# Altium PCB iotv3.PcbDoc
Units mm, origin at the board's own origin, x right, y up, seen from the top; angles counter-clockwise.
Board outline 151 x 86.38 mm, 2 copper layers (Top Layer, Bottom Layer); 94 components, 91 nets, 294 pads, 1 vias.
Unrouted connection lines stored in the file: 1.
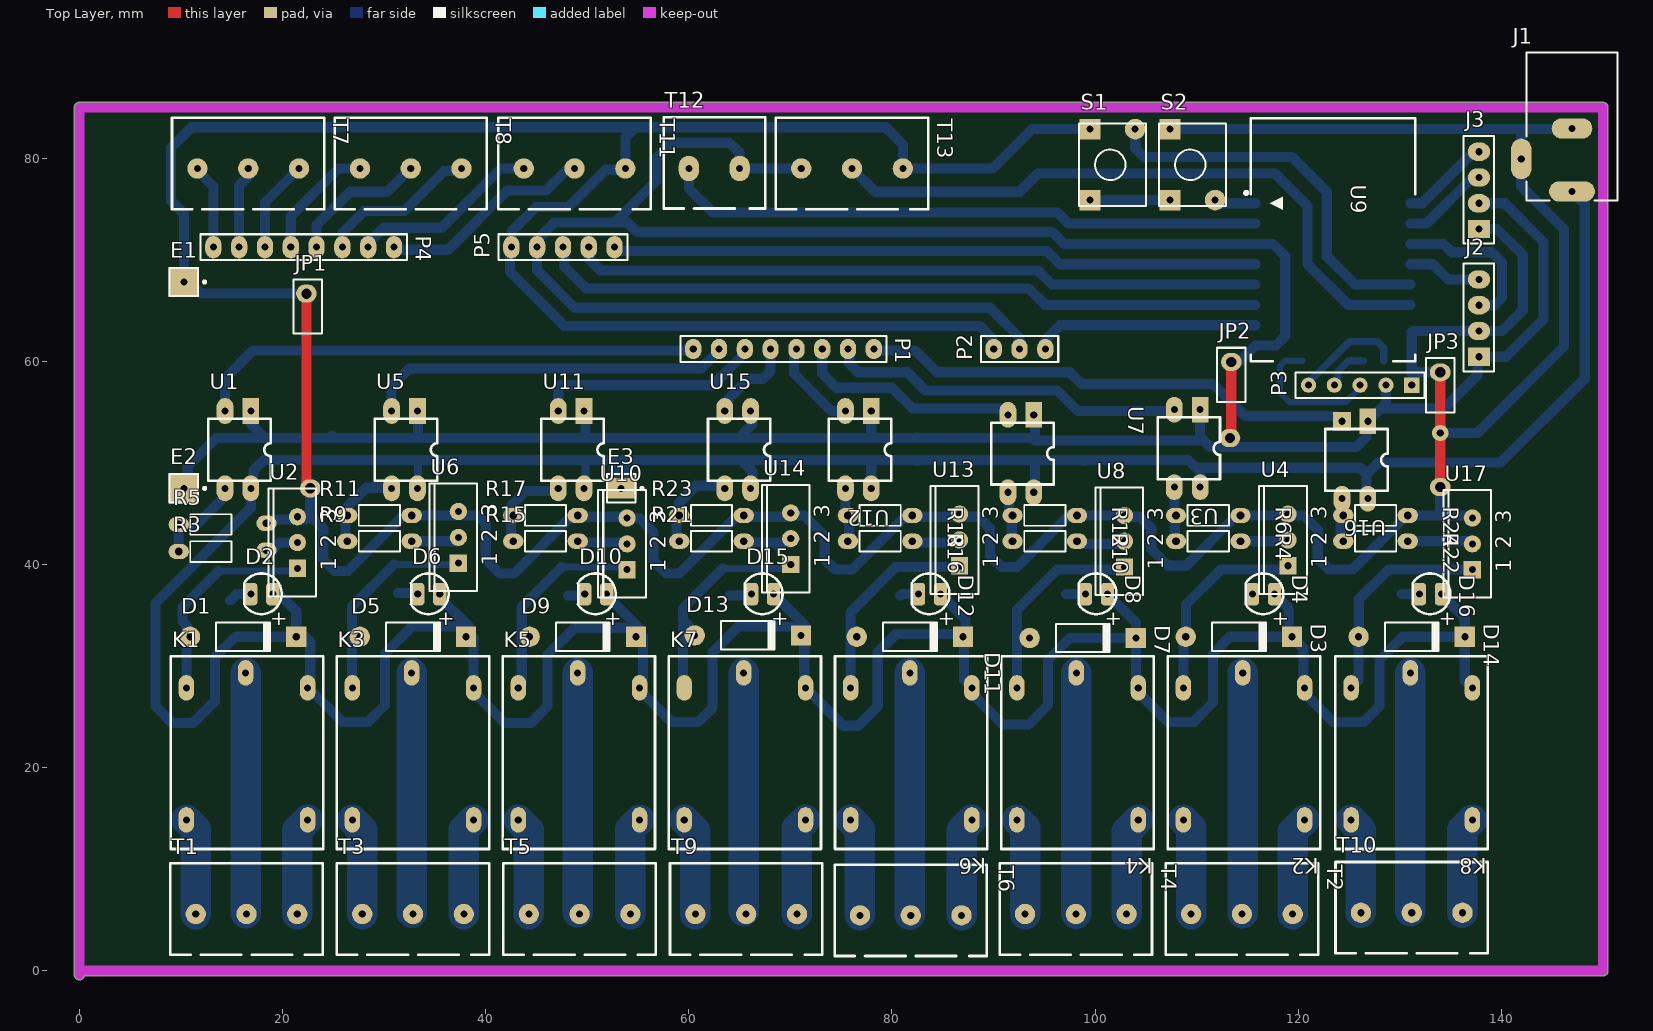
[diagram p0: Top Layer view]
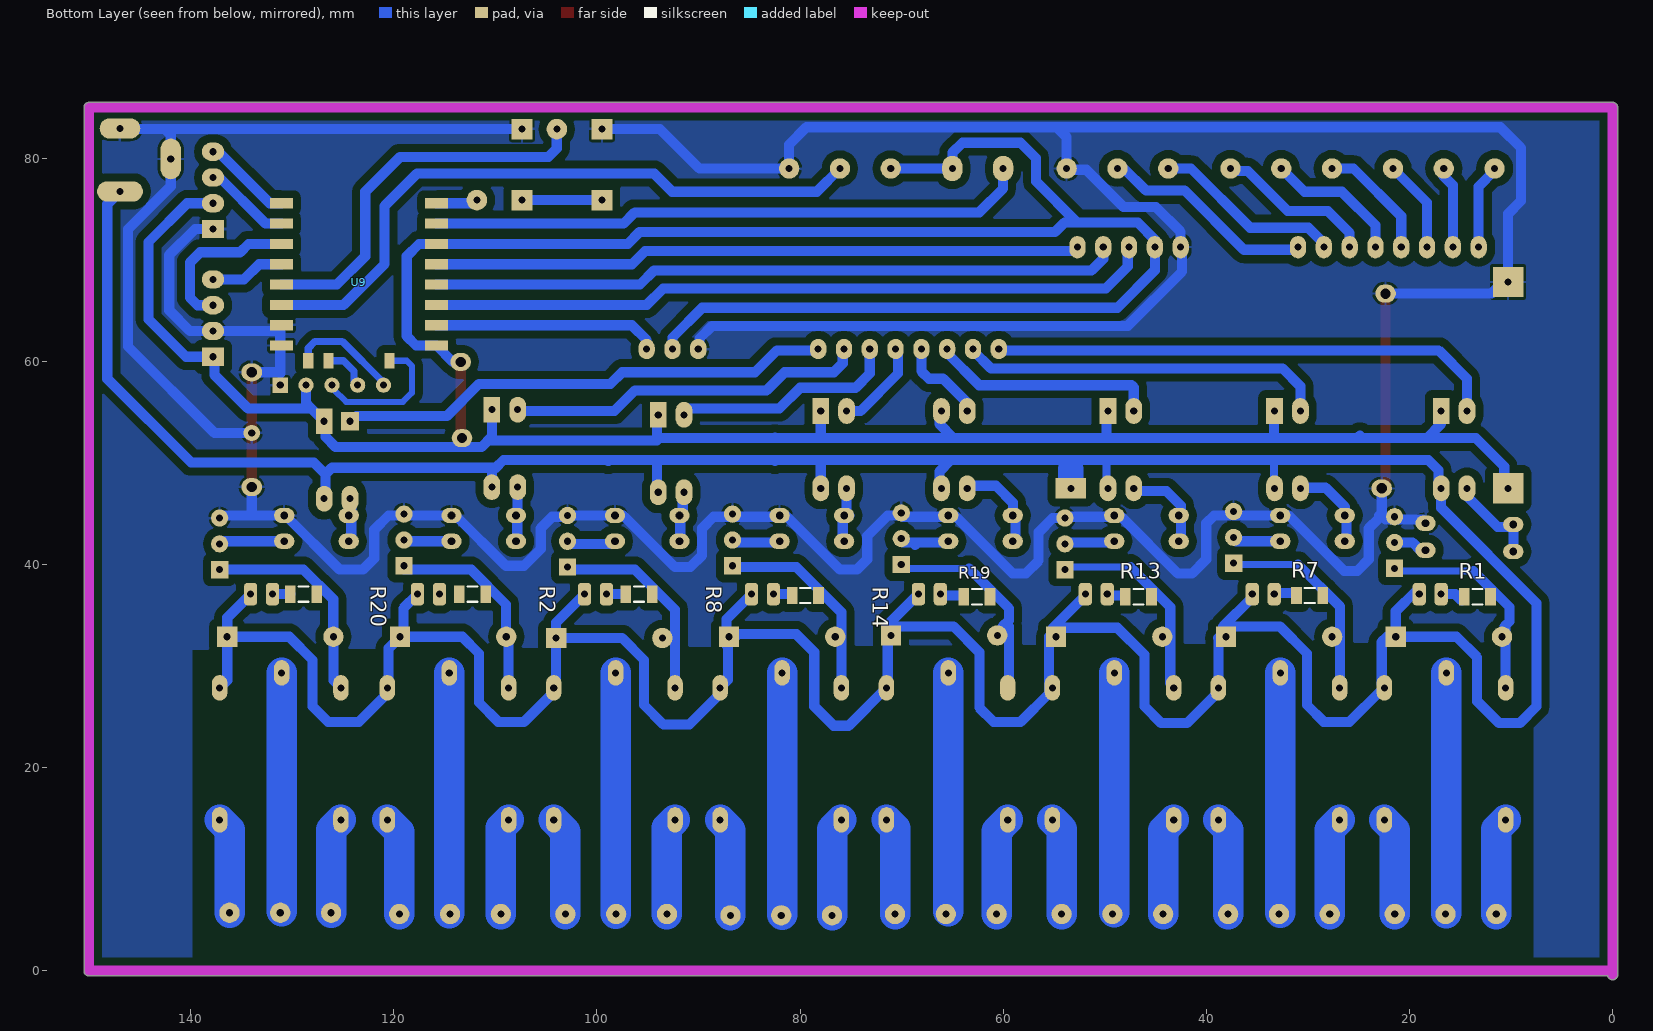
[diagram p1: Bottom Layer view, seen from below]
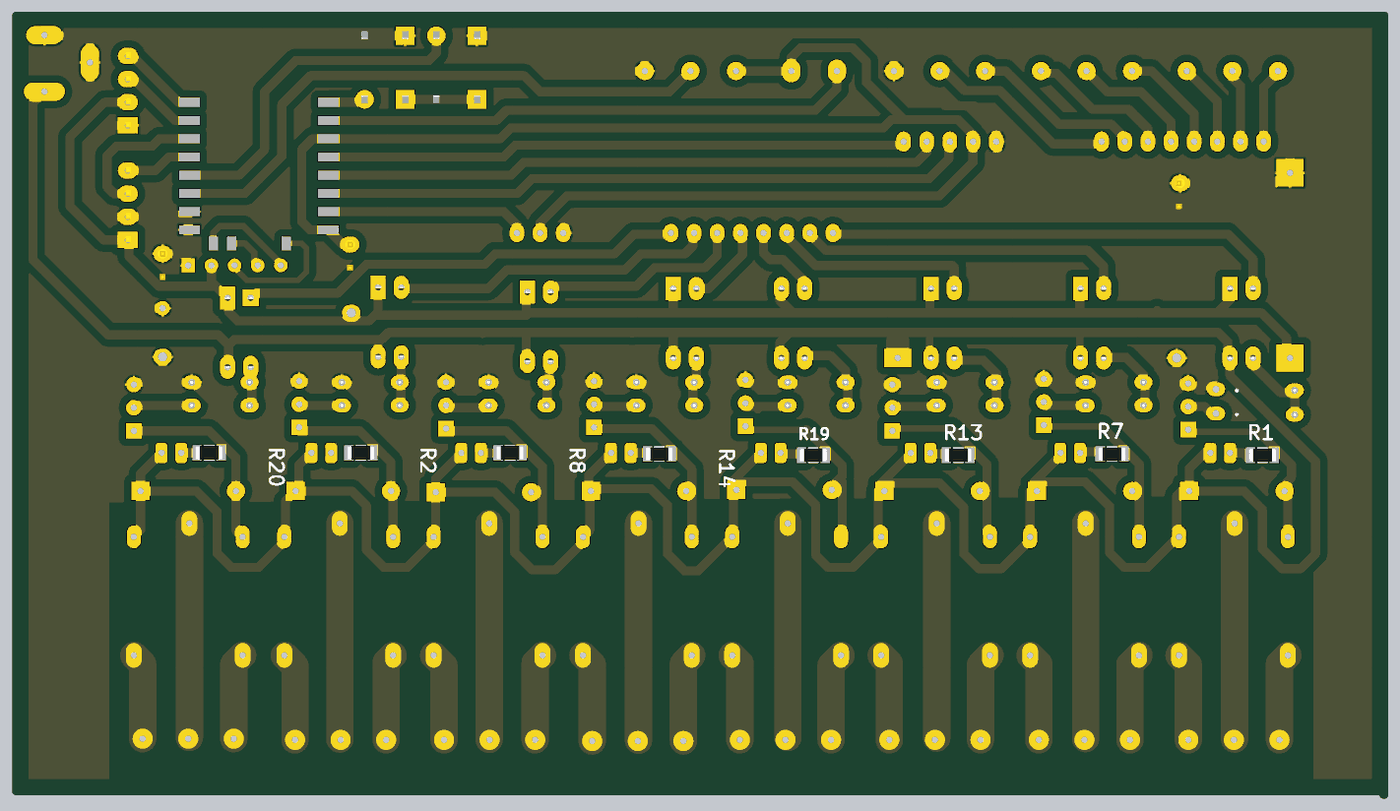
[diagram p2: 3D render of the assembled board from below, using the file's embedded part models]

## Layer stack, top to bottom
Top Solder: solder mask 0.0102, Solder Resist, Dk 3.5
Top Layer: signal copper 0.0356
Dielectric 1: dielectric 0.32, FR-4, Dk 4.8
Bottom Layer: signal copper 0.0356
Bottom Solder: solder mask 0.0102, Solder Resist, Dk 3.5

## Board outline
-0.5,-0.381 -0.5,85 cw(c0,85) 0,85.5 150,85.5 cw(c150,85) 150.5,85 150.5,0 cw(c150,0) 150,-0.5 0.486,-0.5 cw(c0,-0.381)

## Design rules (kind name [scope] priority, off if disabled: settings)
Clearance Clearance_1 [InPolygon] p1: gap=0.8 ignorepadtopadclearanceinfootprint=FALSE
Clearance [All] p2: gap=0.254 ignorepadtopadclearanceinfootprint=FALSE except(0: Arc-Hole Track-Hole SMDPad-Hole THPad-Hole Via-Hole Fill-Hole Poly-Hole Region-Hole Text-Hole)
PolygonConnect [All] p1: connectstyle=Relief reliefconductorwidth=0.254 reliefentries=4 polygonreliefangle="90 Angle" airgapwidth=0.254
RoomDefinition iotv3 [InComponentClass('iotv3')] p1: confinementstyle=ConfineIn formatcopy=TRUE lockcomponents=FALSE outline 144.907,-4.953 247.904,-4.953 247.904,23.114 144.907,23.114
RoutingLayers [All] p1: top layer_v5=FALSE bottom layer_v5=TRUE
RoutingVias [All] p1: holewidth=0.711 width=2.5 viastyle="Through Hole" minholewidth=0.711 minwidth=1.27 maxholewidth=0.711 maxwidth=2
SolderMaskExpansion [All] p1: expansion=0.102
Width [All] p1: maxlimit=3 minlimit=0.7 preferedwidth=1
29 further rules are at their usual default settings.

## Components (designator, comment, footprint, x,y, rotation, side; value= is the part's Value field where it differs from the comment)
D1 "Diode 1N4007" DO-41 16.119,32.893 r0 top
D2 "LED 3mm" LED-3mm 18.024,37.211 r270 top
D3 "Diode 1N4007" DO-41 114.156,32.893 r0 top
D4 "LED 3mm" LED-3mm 116.643,37.211 r270 top
D5 "Diode 1N4007" DO-41 32.841,32.893 r0 top
D6 "LED 3mm" LED-3mm 34.46,37.211 r270 top
D7 "Diode 1N4007" DO-41 98.789,32.766 r0 top
D8 "LED 3mm" LED-3mm 100.206,37.211 r270 top
D9 "Diode 1N4007" DO-41 49.562,32.893 r0 top
D10 "LED 3mm" LED-3mm 50.897,37.211 r270 top
D11 "Diode 1N4007" DO-41 81.771,32.893 r0 top
D12 "LED 3mm" LED-3mm 83.77,37.211 r270 top
D13 "Diode 1N4007" DO-41 65.809,33.02 r0 top
D14 "Diode 1N4007" DO-41 131.174,32.893 r0 top
D15 "LED 3mm" LED-3mm 67.333,37.211 r270 top
D16 "LED 3mm" LED-3mm 133.079,37.211 r270 top
E1 "Antenna" PIN1#1 10.287,67.818 r270 top
E2 "Antenna" PIN1#1 10.287,47.498 r270 top
E3 "Antenna" PIN1#2 53.34,47.498 r270 top
J1 "PWR2.5" KLD-0202 146.955,90.431 r270 top
J2 "Header4X1" "HEADER 4X1" 137.795,60.452 r90 top
J3 "Header4X1" "HEADER 4X1" 137.795,73.025 r90 top
JP1 "Jumper" "Header 2X1"#1 22.479,65.405 r90 top
JP2 "Jumper" "Header 2X1"#2 113.411,58.674 r90 top
JP3 "Jumper" "Header 2X1"#3 133.985,57.658 r90 top
K1 "Relay-12vDC" Relays#1 23.993,30.988 r180 top
K2 "Relay-12vDC" Relays#1 122.157,30.988 r180 top
K3 "Relay-12vDC" Relays#1 40.334,30.988 r180 top
K4 "Relay-12vDC" Relays#1 105.774,30.988 r180 top
K5 "Relay-12vDC" Relays#1 56.674,30.988 r180 top
K6 "Relay-12vDC" Relays#1 89.391,30.988 r180 top
K7 "Relay-12vDC" Relays#2 73.015,30.988 r180 top
K8 "Relay-12vDC" Relays#1 138.667,30.988 r180 top
P1 "Header 8" HDR1X8#1 60.435,61.214 r0 top
P2 "Header 3" HDR1X3 95.106,61.214 r180 top
P3 "Header 5" HDR1X5#1 131.174,57.658 r180 top
P4 "Header 8" HDR1X8#2 13.191,71.247 r0 top
P5 "Header 5" HDR1X5#2 52.688,71.247 r180 top
R1 "Res2" "RES 1206 (3216X08L)" 13.318,36.83 r180 bottom value=1K
R2 "Res2" "RES 1206 (3216X08L)" 112.251,37.084 r180 bottom value=1K
R3 "Res2" Res-(1/4)#1 12.954,41.275 r0 top value=1K
R4 "Res2" Res-(1/4)#2 111.145,42.291 r0 top value=1K
R5 "Res2" Res-(1/4)#1 12.954,43.942 r0 top value=1K
R6 "Res2" Res-(1/4)#2 111.145,44.831 r0 top value=1K
R7 "Res2" "RES 1206 (3216X08L)" 29.828,36.957 r180 bottom value=1K
R8 "Res2" "RES 1206 (3216X08L)" 95.868,37.084 r180 bottom value=1K
R9 "Res2" Res-(1/4)#2 29.544,42.291 r0 top value=1K
R10 "Res2" Res-(1/4)#2 95.054,42.291 r0 top value=1K
R11 "Res2" Res-(1/4)#2 29.544,44.831 r0 top value=1K
R12 "Res2" Res-(1/4)#2 95.054,44.831 r0 top value=1K
R13 "Res2" "RES 1206 (3216X08L)" 46.694,36.83 r180 bottom value=1K
R14 "Res2" "RES 1206 (3216X08L)" 79.485,36.957 r180 bottom value=1K
R15 "Res2" Res-(1/4)#2 45.889,42.291 r0 top value=1K
R16 "Res2" Res-(1/4)#2 78.835,42.291 r0 top value=1K
R17 "Res2" Res-(1/4)#2 45.889,44.831 r0 top value=1K
R18 "Res2" Res-(1/4)#2 78.835,44.831 r0 top value=1K
R19 "Res2" "RES 1206 (3216X08L)" 62.594,36.83 r180 bottom value=1K
R20 "Res2" "RES 1206 (3216X08L)" 128.888,37.084 r180 bottom value=1K
R21 "Res2" Res-(1/4)#2 62.235,42.291 r0 top value=1K
R22 "Res2" Res-(1/4)#2 127.618,42.291 r0 top value=1K
R23 "Res2" Res-(1/4)#2 62.235,44.831 r0 top value=1K
R24 "Res2" Res-(1/4)#2 127.618,44.831 r0 top value=1K
S1 "PUSH BUTTON DOUBLE" "PUSH BUTTON"#1 101.727,79.375 r90 top
S2 "PUSH BUTTON DOUBLE" "PUSH BUTTON"#2 109.601,79.375 r90 top
T1 "Terminal" "Terminal 1*3" 8.953,1.588 r0 top
T2 "Terminal" "Terminal 1*3" 106.957,1.588 r0 top
T3 "Terminal" "Terminal 1*3" 25.352,1.588 r0 top
T4 "Terminal" "Terminal 1*3" 90.607,1.588 r0 top
T5 "Terminal" "Terminal 1*3" 41.75,1.588 r0 top
T6 "Terminal" "Terminal 1*3" 74.351,1.461 r0 top
T7 "Terminal" "Terminal 1*3" 9.12,74.994 r0 top
T8 "Terminal" "Terminal 1*3" 25.122,74.994 r0 top
T9 "Terminal" "Terminal 1*3" 58.149,1.588 r0 top
T10 "Terminal" "Terminal 1*3" 123.674,1.715 r0 top
T11 "Terminal" "Terminal 1*3" 41.251,74.994 r0 top
T12 "Terminal" "Terminal 1*2" 57.514,75.057 r0 top
T13 "Terminal" "Terminal 1*3" 68.573,74.994 r0 top
U1 "PC817" DIP4#1 16.881,55.118 r270 top
U2 "L4931CV30" TO-220A 21.463,42.164 r90 top
U3 "PC817" DIP4#1 110.346,55.245 r270 top
U4 "L4931CV30" TO-220A 119.001,42.418 r90 top
U5 "PC817" DIP4#1 33.281,55.118 r270 top
U6 "L4931CV30" TO-220A 37.309,42.672 r90 top
U7 "PC817" DIP4#1 93.963,54.737 r270 top
U8 "L4931CV30" TO-220A 102.891,42.291 r90 top
U9 "ESP_12_E" ESP_12_E 115.426,75.565 r0 top
U10 "L4931CV30" TO-220A 53.927,42.037 r90 top
U11 "PC817" DIP4#1 49.681,55.118 r270 top
U12 "PC817" DIP4#1 77.961,55.118 r270 top
U13 "L4931CV30" TO-220A 86.654,42.418 r90 top
U14 "L4931CV30" TO-220A 70.037,42.545 r90 top
U15 "PC817" DIP4#2 66.081,55.118 r270 top
U16 "PC817" DIP4#3 126.856,54.102 r270 top
U17 "L4931CV30" TO-220A 137.143,42.037 r90 top

## Footprints (in the part's own frame and the unit in brackets; to place one, negate y for a bottom-side part, rotate by r counter-clockwise, add the part's x,y. Pads: shape width x height; smd on the part's side, far side on the other; paste and mask are expansions set on the pad)
DIP4#1 [mm]
  rect 2.54x1.651 hole 0.7: 1(0,0)
  oval 2.54x1.651 hole 0.7: 2(0,-2.54) 3(7.62,-2.54) 4(7.62,0)
  silkscreen extent 0.76,-4.19 6.86,1.96, body extent -0.13,-3.56 7.75,1.03, height 4.3
DIP4#2 [mm]
  oval 2.54x1.651 hole 0.7: 1(0,0) 2(0,-2.54) 3(7.62,-2.54) 4(7.62,0)
  silkscreen extent 0.76,-4.19 6.86,1.96, body extent -0.13,-3.56 7.75,1.03, height 4.3
DIP4#3 [mm]
  rect 2.54x1.651 hole 0.7: 1(0,0)
  rect 1.8x1.8 hole 0.7: 2(0,-2.54)
  oval 2.54x1.651 hole 0.7: 3(7.62,-2.54) 4(7.62,0)
  silkscreen extent 0.76,-4.19 6.86,1.96, body extent -0.13,-3.56 7.75,1.03, height 4.3
DO-41 [mm] "Diode, Axial; Body 5.2 x 2.7 mm (LxDia. max), Lead Dia. 0.86 mm (max)"
  round 2 hole 0.7: 1(-5.23,0)
  rect 2x2 hole 0.7: 2(5.23,0)
  silkscreen extent -2.65,-1.4 2.75,1.4
ESP_12_E [mm] "ESP-12 Wi-Fi Module by AI-Thinker"
  rect 2.25x1 smd far side: 1(0.375,0) 2(0.375,-2) 3(0.375,-4) 4(0.375,-6) 5(0.375,-8) 6(0.375,-10) 7(0.375,-12) 8(0.375,-14) 15(15.625,-14) 16(15.625,-12) 17(15.625,-10) 18(15.625,-8) 19(15.625,-6) 20(15.625,-4) 21(15.625,-2) 22(15.625,0)
  rect 1x1.5 smd far side: 10(5,-15.5) 13(11,-15.5) 14(13,-15.5)
  silkscreen extent -0.7,-15.57 16.08,8.37, body extent 0,-15.49 16,8.51, height 2.75
HDR1X3 [mm] "Connector; Header; 3 Position"
  oval 1.6x2 hole 0.7: 1(0,0) 2(2.54,0) 3(5.08,0)
  silkscreen extent -1.27,-1.27 6.35,1.27
HDR1X5#1 [mm] "Connector; Header; 5 Position"
  rect 1.5x1.5 hole 0.7: 1(0,0)
  round 1.5 hole 0.7: 2(2.54,0) 3(5.08,0) 4(7.62,0) 5(10.16,0)
  silkscreen extent -1.27,-1.27 11.43,1.27
HDR1X5#2 [mm] "Connector; Header; 5 Position"
  oval 1.6x2.2 hole 0.7: 1(0,0) 2(2.54,0) 3(5.08,0) 4(7.62,0) 5(10.16,0)
  silkscreen extent -1.27,-1.27 11.43,1.27
HDR1X8#1 [mm] "Connector; Header; 8 Position"
  oval 1.6x2 hole 0.7: 1(0,0) 2(2.54,0) 3(5.08,0) 4(7.62,0) 5(10.16,0) 6(12.7,0) 7(15.24,0) 8(17.78,0)
  silkscreen extent -1.27,-1.27 19.05,1.27
HDR1X8#2 [mm] "Connector; Header; 8 Position"
  oval 1.6x2.2 hole 0.7: 1(0,0) 2(2.54,0) 3(5.08,0) 4(7.62,0) 5(10.16,0) 6(12.7,0) 7(15.24,0) 8(17.78,0)
  silkscreen extent -1.27,-1.27 19.05,1.27
"Header 2X1"#1 [mil]
  oval 70x80 hole 40: 1(-705,-10) 2(50,5)
  silkscreen extent -105,-55 105,55, body extent -100,-50 100,50, height 374
"Header 2X1"#2 [mil]
  oval 70x80 hole 40: 1(-245,5) 2(50,0)
  silkscreen extent -105,-55 105,55, body extent -100,-50 100,50, height 374
"Header 2X1"#3 [mil]
  oval 70x80 hole 40: 1(-395,0) 2(50,0)
  silkscreen extent -105,-55 105,55, body extent -100,-50 100,50, height 374
"HEADER 4X1" [mm]
  rect 1.8x2.2 hole 0.7: 1(0,0)
  oval 1.8x2.2 hole 0.7: 2(2.54,0) 3(5.08,0) 4(7.62,0)
  silkscreen extent -1.43,-1.5 9.18,1.5, body extent -1.19,-1.22 8.97,1.32, height 8.38
KLD-0202 [mm] "DC Power Jack, 2.5mm, KLD Series, PCB Mount"
  oval 2x4.5 hole 0.7: 1(13.7,0)
  round 1.5 all layers, no hole: 1A(13.7,-1.25) 1B(13.7,1.25) 2A(7.5,-1) 2B(7.5,1) 3A(9.5,-5) 3B(11.5,-5)
  oval 2x4 hole 0.7: 2(7.5,0)
  oval 4x2 hole 0.7: 3(10.5,-5)
  silkscreen extent 0,-4.5 14.6,4.5
LED-3mm [mm] "LED; 2 Leads"
  rrect50% 2.2x1.3 hole 0.7: 1(0.127,1.016) 2(0.127,-1.143)
  silkscreen extent -1.9,-1.81 2.09,1.89
PIN1#1 [mm] "Generic Antenna; 1 Lead"
  rect 3x3 hole 0.7: 1(0,0)
  silkscreen extent -1.4,-1.4 1.4,2.18
PIN1#2 [mm] "Generic Antenna; 1 Lead"
  rect 2x3 hole 0.7: 1(0,0)
  silkscreen extent -1.4,-1.4 1.4,2.18
"PUSH BUTTON"#1 [mil]
  rect 80x80 hole 27.56: 1(-137.5,87.5) 2(137.5,87.5)
  round 80 hole 27.56: 4(137.5,-87.5)
  silkscreen extent -160,-130 160,130, body extent -155,-121 157,123, height 205
"PUSH BUTTON"#2 [mil]
  rect 80x80 hole 27.56: 1(-137.5,87.5) 2(137.5,87.5)
  round 80 hole 27.56: 3(-137.5,-87.5)
  silkscreen extent -160,-130 160,130, body extent -155,-121 157,123, height 205
Relays#1 [mil]
  oval 60x98.43 hole 27.56: 1(300,65) 2(60,635) 3(530,635) 4(60,123.11) 5(530,123.11)
  silkscreen extent 0,0 591,748
Relays#2 [mil]
  oval 60x98.43 hole 27.56: 1(300,65) 2(60,635) 3(530,635) 4(60,123.11)
  oval 60x98.43 all layers, no hole: 5(530,123.11)
  silkscreen extent 0,0 591,748
"RES 1206 (3216X08L)" [mm] "Chip Resistor, 2-Leads, Body 3.2x1.6mm, IPC High Density _ (0.125 W)"
  rect 1.05x1.7 smd: 1(-1.295,0) 2(1.301,0)
  silkscreen extent -0.5,-0.75 0.5,0.75, body extent -1.52,-0.76 1.53,0.76, height 0.6
Res-(1/4)#1 [mm]
  oval 2x1.5 hole 0.762 unplated: 1(-3.175,0) 2(5.461,0.127)
  silkscreen extent -2.03,-1.02 2.03,1.02, body extent -3.43,-0.93 3.43,0.91, height 2.92
Res-(1/4)#2 [mm]
  oval 2x1.5 hole 0.762 unplated: 1(-3.175,0) 2(3.175,0)
  silkscreen extent -2.03,-1.02 2.03,1.02, body extent -3.43,-0.93 3.43,0.91, height 2.92
"Terminal 1*2" [mm]
  oval 2x2.5 hole 0.7: 1(2.493,3.937) 2(7.493,3.937)
  silkscreen extent 0,0 10,9
"Terminal 1*3" [mm]
  round 2 hole 0.7: 1(2.5,4) 2(7.5,4) 3(12.5,4)
  silkscreen extent 0,0 15,9
TO-220A [mm] "TO, Thru-Hole, Vertical, Heatsink Mounted; 3 In-Line Leads; Pitch 2.54 mm"
  rect 1.7x1.7 hole 0.7: 1(-2.54,0)
  round 1.7 hole 0.7: 2(0,0) 3(2.54,0)
  silkscreen extent -5.3,-1.85 5.3,2.85

## Part data
D1 D3 D5 D7 D9 D11 D13 D14: "1 Amp General Purpose Rectifier", Code_JEDEC=DO-204-AL, ComponentLink1Description="Manufacturer Link", ComponentLink1URL=http://www.fairchildsemi.com/, ComponentLink2Description=Datasheet, ComponentLink2URL=http://www.fairchildsemi.com/ds/1N%2F1N4001.pdf, DatasheetVersion=1998, LatestRevisionDate=17-Jul-2002, LatestRevisionNote="Re-released for DXP Platform.", PackageDescription="Diode, Axial; Body 5.2 x 2.7 mm (LxDia. max), Lead Dia. 0.86 mm (max)", PackageReference=DO-41, PackageVersion=Aug-1999, Published=8-Jun-2000, Publisher="Altium Limited"
D2 D4 D6 D8 D10 D12 D15 D16: "Typical LED", Designer="Seyed Mohsen Ghasemian", PackageDescription="LED; 2 Leads", PackageReference=LED, Published=02/04/2012, Publisher=www.picpars.com
E1 E2 E3: "Generic Antenna", LatestRevisionDate=17-Jul-2002, LatestRevisionNote="Re-released for DXP Platform.", PackageReference=PIN1, Published=24-Mar-1999, Publisher="Altium Limited"
J1: "Low Voltage Power Supply Connector", ComponentLink1Description="Manufacturer Link", ComponentLink1URL=http://domino.kycon.com/internet/Products.html, DatasheetDocument=09-May-2002, Published=17-Dec-2003, Publisher="Altium Limited"
K1 K2 K3 K4 K5 K6 K7 K8: library part Relay-05vDC, "Relay-05vDC-240AC 5A", ComponentLinkURL=www.picpars.com, Designer="Seyed Mohsen Ghasemain"
P1 P4: "Header, 8-Pin", LatestRevisionDate=17-Jul-2002, LatestRevisionNote="Re-released for DXP Platform.", Publisher="Altium Limited"
P2: "Header, 3-Pin", LatestRevisionDate=17-Jul-2002, LatestRevisionNote="Re-released for DXP Platform.", Publisher="Altium Limited"
P3 P5: "Header, 5-Pin", LatestRevisionDate=17-Jul-2002, LatestRevisionNote="Re-released for DXP Platform.", Publisher="Altium Limited"
R1 R2 R3 R4 R5 R6 R7 R8 R9 R10 R11 R12 R13 R14 R15 R16 R17 R18 R19 R20 R21 R22 R23 R24: "Resistor", LatestRevisionDate=17-Jul-2002, LatestRevisionNote="Re-released for DXP Platform.", PackageDescription="Axial Device, Thru-Hole; 2 Leads; 0.4 in Pin Spacing", PackageReference=AXIAL-0.4, Published=8-Jun-2000, Publisher="Altium Limited"
S1 S2: "Switch"
T1 T2 T3 T4 T5 T6 T7 T8 T9 T10 T11 T13: library part "Terminal 1*3", "Terminal 3 Pin 250VAC 16A", ComponentLinkURL=www.picpars.com, Designer="Seyed Mohsen Ghasemain", E-mail=picpars@gmail.com
T12: library part "Terminal 1*2", "Terminal 2 Pin 250VAC 16A", ComponentLinkURL=www.picpars.com, Designer="Seyed Mohsen Ghasemain", E-mail=picpars@gmail.com
U1 U3 U5 U7 U11 U12 U15 U16: library part OPTCOUPLER_01, "4-Pin Phototransistor Optocoupler"
U2 U4 U6 U8 U10 U13 U14 U17: "250mA, Very Low Drop ( 0.4V) Voltage Regulator", ComponentLink1Description="Manufacturer Link", ComponentLink1URL=http://www.st.com/, ComponentLink2Description=Datasheet, ComponentLink2URL=http://www.st.com/stonline/products/literature/ds/4340/l4931abxx15.pdf, DatasheetVersion=Apr-1999, LatestRevisionDate=06-Jun-2005, LatestRevisionNote="PCB Pin sequence re-ordered.", PackageDescription="TO, Thru-Hole, Vertical, Heatsink Mounted; 3 In-Line Leads; Pitch 2.54 mm", PackageReference=TO-220A, PackageVersion=Jul-2004, Published=24-Aug-2001, Publisher="Altium Limited"
U9: "ESP-12 Wi-Fi Module by AI-Thinker", IC=ESP8266-EX, Vendor=Ai-thinker

## Via types
v1: diameter 1.6, hole 0.711, Top Layer to Bottom Layer, 1 vias

## Nets (pads, with @x,y where several pads share a name; then routed paths per layer and width w, separated by ;. In a path a pad name is that pad's centre, name@x,y a point inside that pad or via, vN(x,y) a via of type N, cw(c..) or ccw(c..) an arc to the next point about the centre after c; other vN are vias at no path point)
ADC: T12.1 U9.2 | length 59.2
  Bottom Layer w1: T12.1 60.007,77.026 62.357,74.676 96.266,74.676 97.377,73.565 U9.2
btn: S1.4 U9.18 | length 38.3
  Bottom Layer w1: S1.4 103.95,80.962 104.775,80.137 119.38,80.137 122.809,76.708 122.809,70.358 125.602,67.565 U9.18
dht: T13.2 U9.17 | length 65.4
  Bottom Layer w1: T13.2 78.359,76.708 92.583,76.708 94.361,78.486 117.729,78.486 120.904,75.311 120.904,69.596 124.935,65.565 U9.17
GND: E1.1 J1.2 J1.2A J1.2B J1.3 J1.3A J1.3B J2.2 J3.1 JP1.1 JP1.2 JP3.1 JP3.2 P2.3 P3.1 P5.5 R5.2 R6.2 R11.2 R12.2 R17.2 R18.2 R23.2 R24.2 S1.2 S2.2 T11.3 T13.3 U2.3 U4.3 U6.3 U8.3 U9.15 U9.16 U10.3 U13.3 U14.3 U17.3 | length 500.2
  Top Layer w1: JP1.1@22.352,47.371 JP1.2 ; JP3.1@133.985,47.498 JP3.1 v1(133.985,52.959) JP3.2
  Bottom Layer w1: R5.2@18.669,44.45 22.352,44.45 22.733,44.831 JP1.1 ; JP1.2 11.938,66.675 10.795,67.818 E1.1 10.287,74.549 9.017,75.819 9.017,81.026 11.049,83.058 54.737,83.058 ; 22.977,44.831 22.977,44.587 24.003,43.561 24.003,40.513 25.146,39.37 26.416,39.37 31.877,44.831 R11.2 U6.3@37.338,44.831 ; U6.3 37.69,44.831 39.233,44.831 40.005,44.059 40.005,40.513 41.402,39.116 42.799,39.116 48.387,44.704 54.229,44.704 U10.3@54.356,44.577 ; P5.5@42.401,71.247 42.401,68.834 47.735,63.5 88.646,63.5 89.899,62.247 P2.3@89.899,61.087 ; P5.5 42.528,72.754 44.958,75.184 48.133,75.184 51.816,78.867 53.624,78.867 T11.3 53.751,82.072 54.737,83.058 ; U10.3@53.467,44.577 U10.3 U10.3@54.356,44.577 ; U14.3@69.85,44.704 64.643,44.704 59.055,39.116 57.785,39.116 56.515,40.386 56.515,43.18 55.118,44.577 U10.3@54.356,44.577 ; U14.3 70.296,44.826 71.369,44.826 73.389,42.806 73.389,40.513 74.405,39.497 76.073,39.497 81.28,44.704 U13.3@86.654,44.704 ; U13.3 86.908,44.704 88.519,44.704 89.645,43.578 89.645,40.911 90.805,39.751 92.329,39.751 97.409,44.831 R12.2 U8.3 ; S1.2 93.789,82.867 89.916,78.994 T13.3 81.073,81.36 79.375,83.058 54.737,83.058 ; U8.3@102.489,44.704 104.394,44.704 105.537,43.561 105.537,41.529 107.188,39.878 108.966,39.878 113.919,44.831 R6.2 120.523,44.831 121.92,43.434 121.92,40.623 123.046,39.497 125.332,39.497 130.666,44.831 R24.2 134.349,44.831 ; S2.2 142.494,82.867 ; JP3.1@133.985,47.117 133.985,45.195 134.349,44.831 ; v1(133.985,52.959) 137.668,52.959 146.177,61.468 146.177,73.025 141.955,77.247 J1.3B ; JP3.2 131.301,58.928 131.174,58.801 131.174,62.865 131.301,62.992 J2.2 140.081,62.992 142.113,65.024 142.113,70.485 139.573,73.025 J3.1 ; U17.3 136.889,44.831 134.349,44.831 ; J1.3 J1.3A 141.955,82.328 142.494,82.867 ; J1.2A 145.891,82.867 142.494,82.867
i1: P4.1 T7.1 | length 8.4
  Bottom Layer w1: T7.1 11.62,78.787 13.191,77.216 P4.1
i2: P4.2 T7.2 | length 8.1
  Bottom Layer w1: P4.2 15.731,77.343 16.62,78.232 T7.2
i3: P4.3 T7.3 | length 9.1
  Bottom Layer w1: P4.3 18.271,75.645 T7.3
i4: P4.4 T8.1 | length 11.8
  Bottom Layer w1: P4.4 20.811,74.295 25.51,78.994 T8.1
i5: P4.5 T8.2 | length 13.7
  Bottom Layer w1: P4.5 23.351,73.406 26.653,76.708 30.336,76.708 T8.2
i6: P4.6 T8.3 | length 15.8
  Bottom Layer w1: P4.6 25.891,72.644 28.05,74.803 31.987,74.803 35.924,78.74 37.368,78.74 T8.3
i7: P4.7 T11.1 | length 18.8
  Bottom Layer w1: P4.7 28.431,71.628 29.955,73.152 35.67,73.152 41.512,78.994 T11.1
i8: P4.8 T11.2 | length 20.7
  Bottom Layer w1: P4.8@31.352,70.993 36.305,70.993 42.147,76.835 45.957,76.835 48.116,78.994 T11.2
ia: P5.1 U9.4 | length 63.8
  Bottom Layer w1: P5.1 53.069,70.866 95.25,70.866 96.551,69.565 U9.4
ib: P5.2 U9.5 | length 67.8
  Bottom Layer w1: P5.2 50.148,70.104 51.291,68.961 94.361,68.961 95.757,67.565 U9.5
ic: P5.3 U9.6 | length 71.5
  Bottom Layer w1: P5.3@47.735,71.247 47.735,69.342 49.894,67.183 93.472,67.183 95.09,65.565 U9.6
miso: P3.3 U9.10 | length 13.6
  Bottom Layer w0.6: U9.10 118.722,60.065 118.22,59.563 118.22,56.896 119.109,56.007 124.57,56.007 ; 124.697,56.007 P3.3@125.967,57.277
mosi: P3.4 U9.13 | length 4.5
  Bottom Layer w0.7: P3.4 123.935,58.039 123.935,59.055 124.945,60.065 U9.13
NetD1_1: D1.1 K1.5 R1.2 U2.1 | length 20.9
  Bottom Layer w0.7: 13.706,39.37 U2.1@21.463,39.37
  Bottom Layer w1: K1.5@10.531,27.988 10.531,33.805 10.635,33.909 10.15,34.394 10.15,35.814 13.706,39.37
NetD2_2: D2.2 R1.1 | length 2.3
  Bottom Layer w1: R1.1@14.842,36.449 15.477,37.084 D2.2
NetD3_1: D3.1 K2.5 R2.2 U4.1 | length 19.8
  Bottom Layer w1: K2.5 108.695,32.662 D3.1 108.949,32.916 108.949,36.068 112.378,39.497 U4.1@119.001,39.497
NetD4_2: D4.2 R2.1
NetD5_1: D5.1 K3.5 R7.2 U6.1 | length 20.4
  Bottom Layer w0.7: 30.978,40.005 U6.1@37.592,40.005
  Bottom Layer w1: K3.5@26.872,27.988 26.829,28.03 26.829,35.856 30.978,40.005
NetD6_2: D6.2 R7.1 | length 1.8
  Bottom Layer w1: R7.1@31.377,37.211 D6.2@33.19,37.211
NetD7_1: D7.1 K4.5 R8.2 U8.1 | length 19.6
  Bottom Layer w1: K4.5 92.312,35.56 96.249,39.497 U8.1@102.616,39.497
NetD8_2: D8.2 R8.1 | length 1.9
  Bottom Layer w1: R8.1 D8.2
NetD9_1: D9.1 K5.5 R13.2 U10.1 | length 19.8
  Bottom Layer w0.7: 47.488,39.751 U10.1@53.721,39.751
  Bottom Layer w1: K5.5@43.212,27.988 43.551,28.327 43.551,35.814 47.488,39.751
NetD10_2: D10.2 R13.1 | length 1.6
  Bottom Layer w1: R13.1@48.116,36.957 D10.2@49.754,36.957
NetD11_1: D11.1 K6.5 R14.2 U13.1 | length 20.1
  Bottom Layer w1: K6.5 75.906,27.884 75.906,32.893 75.929,32.916 75.929,35.306 80.374,39.751 U13.1@86.741,39.751
NetD12_2: D12.2 R14.1 | length 1.9
  Bottom Layer w1: R14.1 80.882,36.957 81.009,37.084 D12.2
NetD13_1: D13.1 K7.5 R19.2 U14.1 | length 20.9
  Bottom Layer w0.7: 63.363,39.624 U14.1@70.037,39.624
  Bottom Layer w1: K7.5@59.426,27.861 59.426,33.909 60.038,33.909 59.426,34.521 59.426,35.687 63.363,39.624
NetD14_1: D14.1 K8.5 R20.2 U17.1 | length 21.4
  Bottom Layer w1: K8.5 125.944,28.6 D14.1 125.967,32.916 125.967,36.576 128.888,39.497 U17.1
NetD15_2: D15.2 R19.1 | length 2.3
  Bottom Layer w1: R19.1@64.016,36.957 D15.2@66.317,36.957
NetD16_2: D16.2 R20.1 | length 1.8
  Bottom Layer w1: R20.1 D16.2
NetK1_1: K1.1 T1.2 | length 23.9
  Bottom Layer w2: T1.2@16.373,5.668 T1.2 ; K1.1 K1.1@16.373,29.464
  Bottom Layer w3: T1.2@16.373,5.668 K1.1
NetK1_2: K1.2 T1.3 | length 9.8
  Bottom Layer w2: K1.2 K1.2@22.469,14.986
  Bottom Layer w3: T1.3 21.453,13.843 K1.2
NetK1_3: K1.3 T1.1 | length 9.8
  Bottom Layer w2: K1.3 K1.3@10.531,14.986
  Bottom Layer w3: K1.3 11.453,13.937 T1.1
NetK2_1: K2.1 T2.2 | length 23.8
  Bottom Layer w2: T2.2 T2.2@114.537,5.668
  Bottom Layer w3: T2.2@114.537,5.668 K2.1
NetK2_2: K2.2 T2.3 | length 9.8
  Bottom Layer w3: T2.3 119.457,13.683 K2.2
NetK2_3: K2.3 T2.1 | length 9.6
  Bottom Layer w3: K2.3 109.457,14.097 T2.1
NetK3_1: K3.1 T3.2 | length 23.9
  Bottom Layer w2: T3.2@32.714,5.726 T3.2 ; K3.1 K3.1@32.714,29.464
  Bottom Layer w3: T3.2@32.714,5.726 K3.1
NetK3_2: K3.2 T3.3 | length 9.8
  Bottom Layer w2: K3.2 K3.2@38.81,14.986
  Bottom Layer w3: T3.3 37.852,13.901 K3.2
NetK3_3: K3.3 T3.1 | length 9.8
  Bottom Layer w2: K3.3 K3.3@26.872,14.986
  Bottom Layer w3: K3.3 27.852,13.879 T3.1
NetK4_1: K4.1 T4.2 | length 23.8
  Bottom Layer w2: T4.2 T4.2@98.154,5.635
  Bottom Layer w3: T4.2@98.154,5.635 K4.1
NetK4_2: K4.2 T4.3 | length 9.7
  Bottom Layer w3: T4.3 103.107,13.716 K4.2
NetK4_3: K4.3 T4.1 | length 9.6
  Bottom Layer w3: K4.3 93.107,14.064 T4.1
NetK5_1: K5.1 T5.2 | length 24
  Bottom Layer w2: T5.2@49.054,5.784 T5.2 ; K5.1 K5.1@49.054,29.464
  Bottom Layer w3: T5.2@49.054,5.784 K5.1
NetK5_2: K5.2 T5.3 | length 9.8
  Bottom Layer w2: K5.2 K5.2@55.15,14.986
  Bottom Layer w3: T5.3 54.25,13.959 K5.2
NetK5_3: K5.3 T5.1 | length 9.8
  Bottom Layer w2: K5.3 K5.3@43.212,14.986
  Bottom Layer w3: K5.3 44.25,13.821 T5.1
NetK6_1: K6.1 T6.2 | length 23.9
  Bottom Layer w2: T6.2@81.771,5.541 T6.2
  Bottom Layer w3: T6.2@81.771,5.541 K6.1
NetK6_2: K6.2 T6.3 | length 9.8
  Bottom Layer w3: T6.3 86.851,13.843 K6.2
NetK6_3: K6.3 T6.1 | length 9.8
  Bottom Layer w3: K6.3 76.851,13.937 T6.1
NetK7_1: K7.1 T9.2 | length 24
  Bottom Layer w2: T9.2@65.395,5.842 T9.2 ; K7.1 K7.1@65.395,29.464
  Bottom Layer w3: T9.2@65.395,5.842 K7.1
NetK7_2: K7.2 T9.3 | length 9.7
  Bottom Layer w2: K7.2 K7.2@71.491,14.986
  Bottom Layer w3: T9.3 70.649,14.017 K7.2
NetK7_3: K7.3 T9.1 | length 9.9
  Bottom Layer w2: K7.3 K7.3@59.553,14.986
  Bottom Layer w3: K7.3 60.649,13.763 T9.1
NetK8_1: K8.1 T10.2 | length 23.7
  Bottom Layer w2: T10.2@131.047,5.842 T10.2
  Bottom Layer w3: T10.2@131.047,5.842 K8.1
NetK8_2: K8.2 T10.3 | length 9.5
  Bottom Layer w3: T10.3 136.174,13.89 K8.2
NetK8_3: K8.3 T10.1 | length 9.5
  Bottom Layer w3: K8.3 126.174,13.89 T10.1
NetR3_1: R3.1 R5.1 U1.3 | length 7.6
  Bottom Layer w1: 9.769,42.164 9.769,43.688 11.303,43.688 14.338,46.723 U1.3@14.338,46.986
NetR3_2: R3.2 U2.2 | length 3.4
  Bottom Layer w1: R3.2 18.923,41.402 19.685,42.164 U2.2
NetR4_1: R4.1 R6.1 U3.3 | length 5.3
  Bottom Layer w1: U3.3 107.806,44.868 107.843,44.831 R4.1@107.843,42.291
NetR4_2: R4.2 U4.2 | length 4.4
  Bottom Layer w1: R4.2 U4.2@118.747,42.291
NetR9_1: R9.1 R11.1 U5.3 | length 8.6
  Bottom Layer w1: R9.1@26.194,42.291 26.194,44.746 26.11,44.831 R11.1 26.369,45.673 28.254,47.558 U5.3@30.53,47.558
NetR9_2: R9.2 U6.2 | length 4.4
  Bottom Layer w1: R9.2 U6.2@37.074,42.291
NetR10_1: R10.1 R12.1 U7.3 | length 5.5
  Bottom Layer w1: R12.1@91.498,44.831 91.55,44.883 U7.3@91.55,47.752 ; R12.1@91.804,44.577 91.804,42.418 R10.1@92.058,42.164
NetR10_2: R10.2 U8.2 | length 4.5
  Bottom Layer w1: R10.2@98.425,42.037 U8.2@102.891,42.037
NetR15_1: R15.1 R17.1 U11.3 | length 8.7
  Bottom Layer w1: R15.1@42.45,42.164 42.493,42.206 42.493,45.795 43.938,47.24 U11.3@46.977,47.24
NetR15_2: R15.2 U10.2 | length 4.3
  Bottom Layer w1: R15.2@49.064,42.164 U10.2@53.33,42.164
NetR16_1: R16.1 R18.1 U12.3 | length 5.3
  Bottom Layer w1: R18.1@75.152,44.831 75.421,45.1 U12.3 ; R16.1@75.802,42.164 R18.1@75.802,44.704
NetR16_2: R16.2 U13.2 | length 4.2
  Bottom Layer w1: R16.2@82.01,42.164 U13.2@86.233,42.164
NetR21_1: R21.1 R23.1 U15.3 | length 9.2
  Bottom Layer w1: R21.1@58.791,42.164 58.791,44.45 59.045,44.704 59.045,46.091 60.706,47.752 U15.3@63.49,47.752
NetR21_2: R21.2 U14.2 | length 4.8
  Bottom Layer w1: R21.2@65.41,42.164 68.443,42.164 ; 68.697,41.91 68.443,42.164 ; U14.2@69.84,42.164 68.443,42.164
NetR22_1: R22.1 R24.1 U16.3 | length 4.2
  Bottom Layer w1: R22.1@124.189,42.291 124.189,44.831 U16.3@124.189,46.482
NetR22_2: R22.2 U17.2 | length 6.5
  Bottom Layer w1: R22.2 136.889,42.291 U17.2
NetS1_1: S1.1 S2.1 | length 7.9
  Bottom Layer w1: S1.1 S2.1
O1: P1.1 U1.2 | length 50.4
  Bottom Layer w1: U1.2 14.341,58.3 17.128,61.087 P1.1@60.435,61.087
O2: P1.2 U5.2 | length 36.3
  Bottom Layer w1: U5.2 30.741,57.555 32.495,59.309 61.214,59.309 62.975,61.07 P1.2
O3: P1.3 U11.2 | length 22.1
  Bottom Layer w1: U11.2 47.141,57.445 47.354,57.658 62.357,57.658 P1.3@65.532,60.833
o4: P1.4 U15.2 | length 8.8
  Bottom Layer w1: U15.2 63.541,55.921 65.913,58.293 67.31,58.293 68.055,59.038 P1.4
o5: P1.5 U12.2 | length 9.1
  Bottom Layer w1: P1.5 70.358,60.977 70.358,58.801 74.041,55.118 U12.2
o6: P1.6 U7.2 | length 22.1
  Bottom Layer w1: P1.6@73.135,61.087 73.135,58.801 74.532,57.404 79.993,57.404 82.025,55.372 U7.2@91.55,55.372
o7: P1.7 U3.2 | length 35
  Bottom Layer w1: P1.7@75.802,61.087 75.802,59.817 76.691,58.928 81.517,58.928 83.295,57.15 96.249,57.15 98.281,55.118 U3.2@107.552,55.118
o8: P1.8 U16.2 | length 48.1
  Bottom Layer w1: P1.8@78.215,61.087 82.279,61.087 84.438,58.928 97.519,58.928 98.662,57.785 111.616,57.785 114.791,54.61 U16.2@123.681,54.61
out: P2.1 U9.7 | length 22.3
  Bottom Layer w1: P2.1@95.106,61.087 P2.1 95.106,62.103 96.568,63.565 U9.7
rst: S2.3 U9.1 | length 4.1
  Bottom Layer w1: S2.3 112.141,75.565 U9.1
rx: J3.3 U9.21 | length 8.3
  Bottom Layer w1: U9.21 132.62,73.565 J3.3@137.414,78.359
sck: P3.5 U9.14 | length 10.9
  Bottom Layer w0.7: P3.5@121.014,57.907 125.083,61.976 127.745,61.976 128.426,61.295 U9.14
  Bottom Layer w1: P3.5 P3.5@121.014,57.907
scl: J2.3 U9.20 | length 15.8
  Bottom Layer w1: U9.20 134.302,71.565 135.128,70.739 139.065,70.739 140.081,69.723 140.081,66.294 139.319,65.532 J2.3
sda: J2.4 U9.19 | length 7.4
  Bottom Layer w1: U9.19 133.254,69.565 134.747,68.072 J2.4
tx: J3.4 U9.22 | length 8.7
  Bottom Layer w1: U9.22 132.207,75.565 J3.4@137.541,80.899
VCC: D1.2 D2.1 D3.2 D4.1 D5.2 D6.1 D7.2 D8.1 D9.2 D10.1 D11.2 D12.1 D13.2 D14.2 D15.1 D16.1 E3.1 J1.1 J1.1A J1.1B K1.4 K2.4 K3.4 K4.4 K5.4 K6.4 K7.4 K8.4 U1.4 U3.4 U5.4 U7.4 U11.4 U12.4 U15.4 U16.4 | length 475.9
  Bottom Layer w0.8: U5.4@33.349,47.498 33.349,50.25 33.391,50.292 ; U11.4@49.816,47.498 49.816,49.953 50.155,50.292
  Bottom Layer w1: U1.4 16.881,45.583 7.493,36.195 7.493,26.035 9.144,24.384 11.176,24.384 13.335,26.543 13.335,30.861 15.367,32.893 D1.2 21.349,35.403 D2.1@19.354,37.398 ; U1.4@17.135,47.752 17.135,49.276 18.151,50.292 33.391,50.292 50.155,50.292 53.467,50.292 ; D1.2@22.111,32.893 22.215,32.893 22.723,32.385 22.723,28.242 K1.4@22.469,27.988 ; K1.4@22.808,27.601 25.898,24.511 28.438,24.511 30.089,26.162 30.089,31.242 32.756,33.909 37.508,33.909 ; D6.1@35.543,36.703 38.337,33.909 37.508,33.909 ; D5.2 38.071,33.347 37.508,33.909 ; D5.2@38.852,32.766 38.81,32.724 K3.4 38.81,27.474 41.9,24.384 44.44,24.384 46.091,26.035 46.091,31.115 48.758,33.782 D9.2@54.072,33.782 ; D10.1@51.856,37.027 55.101,33.782 D9.2@54.072,33.782 ; 53.467,49.53 53.467,50.292 ; D9.2 54.792,33.062 D9.2@54.072,33.782 ; D9.2@55.489,32.893 55.489,27.305 58.283,24.511 60.95,24.511 62.347,25.908 62.347,31.369 64.887,33.909 D13.2@70.498,33.909 ; U15.4@66.284,47.498 66.284,49.149 65.141,50.292 ; D15.1 71.524,33.909 D13.2@70.498,33.909 ; K7.4@71.364,27.861 D13.2@71.364,33.043 ; K7.4 75.222,24.13 76.691,24.13 78.596,26.035 78.596,31.369 80.374,33.147 86.112,33.147 D11.2@87.105,32.154 ; D13.2@71.514,32.893 D13.2@71.364,33.043 ; U12.4 77.961,50.165 78.088,50.292 ; 82.482,50.216 82.406,50.292 ; D12.1 87.232,34.638 87.232,32.027 D11.2@87.105,32.154 ; U7.4@94.09,47.752 94.09,50.292 ; 98.882,50.199 98.789,50.292 ; D8.1 104.019,34.287 D7.2 ; U3.4 110.346,49.53 ; D4.1 119.056,35.687 119.056,33.223 D3.2 ; U16.4@126.729,47.498 126.729,48.895 ; D16.1 136.404,34.775 D14.2 ; K8.4 136.404,28.6 D14.2 ; J1.1 148.209,75.477 148.209,58.293 139.954,50.038 127.872,50.038 126.729,48.895 ; 53.467,50.292 65.141,50.292 ; 65.141,50.292 78.088,50.292 ; D13.2@70.498,33.909 D13.2@71.364,33.043 ; 78.088,50.292 82.406,50.292 ; 82.406,50.292 94.09,50.292 ; D11.2@87.105,32.154 87.105,28.623 K6.4 87.867,27.305 90.915,24.257 93.455,24.257 95.36,26.162 95.36,30.607 97.519,32.766 D7.2 ; 94.09,50.292 98.789,50.292 ; 98.789,50.292 109.203,50.292 109.965,49.53 110.346,49.53 ; D7.2 104.019,28.092 K4.4 104.25,27.432 107.171,24.511 109.711,24.511 111.616,26.416 111.616,31.242 113.267,32.893 D3.2 ; 110.346,49.53 126.094,49.53 126.729,48.895 ; D3.2 120.506,31.773 120.506,27.988 K2.4 120.633,27.305 123.427,24.511 126.475,24.511 127.999,26.035 127.999,30.607 130.285,32.893 D14.2
  Bottom Layer w2.5: E3.1@53.34,48.133 53.34,49.403
VDD: E2.1 J2.1 J3.2 JP2.1 JP2.2 P2.2 P3.2 P5.4 T12.2 T13.1 U1.1 U3.1 U5.1 U7.1 U9.3 U9.8 U11.1 U12.1 U15.1 U16.1 | length 359.2
  Top Layer w1: JP2.1@113.411,52.451 JP2.2
  Bottom Layer w1: E2.1 10.668,47.879 10.668,49.657 13.462,52.451 18.278,52.451 ; U1.1 16.881,53.848 18.278,52.451 ; 24.882,52.705 25.136,52.451 ; U5.1@33.349,55.118 33.349,52.536 33.264,52.451 ; P5.4@45.068,70.612 45.068,68.961 48.751,65.278 89.645,65.278 92.566,62.357 P2.2 P2.2@92.566,61.087 ; P5.4 45.068,71.992 46.736,73.66 52.705,73.66 ; U11.1@49.816,55.118 49.816,52.663 50.028,52.451 ; U15.1@66.284,55.118 66.284,53.848 64.887,52.451 ; T13.1 T12.2 65.007,80.535 64.008,81.534 58.293,81.534 56.769,80.01 56.769,77.724 52.705,73.66 ; U12.1 77.961,52.578 77.834,52.451 ; 82.482,52.502 82.533,52.451 ; U7.1@94.09,55.372 94.09,52.451 ; 110.346,52.197 94.09,52.197 94.09,52.451 ; U3.1 110.346,52.578 111.362,51.562 125.713,51.562 126.729,52.578 U16.1@126.729,53.848 ; JP2.2 114.18,59.944 U9.8 117.809,61.565 118.728,62.484 118.728,70.358 117.521,71.565 U9.3 96.964,71.565 95.778,72.751 54.884,72.751 53.975,73.66 52.705,73.66 ; U16.1 128.27,55.516 ; P3.2 128.634,55.88 128.27,55.516 ; J3.2 140.335,75.565 144.145,71.755 144.145,64.135 140.462,60.452 J2.1 137.668,60.325 137.668,58.674 134.366,55.372 128.414,55.372 128.27,55.516 ; 18.278,52.451 25.136,52.451 ; 25.136,52.451 33.264,52.451 ; 33.264,52.451 50.028,52.451 ; 50.028,52.451 64.887,52.451 ; 64.887,52.451 77.834,52.451 ; 77.834,52.451 82.533,52.451 ; 82.533,52.451 94.09,52.451

## Polygon pours and split planes (outlines as drawn)
GND on Bottom Layer "Bottom Layer-No Net" (solid, pour order 24): 0,0 149.746,0 150,0.254 150,85 0,85

## Keep-outs
Keep-Out Layer:
  lines w1: 0,-0.381 0,85 150,85 150,0 0,0

## Other copper
Bottom Layer:
  pour cut-out: 7.747,0 7.747,32.388 139.827,31.622 139.827,0

## Text inside footprints (layer, text, board x,y; h text height)
D2: Top Overlay "+" at 18.786,34.036 h1.52
D4: Top Overlay "+" at 117.405,34.036 h1.52
D6: Top Overlay "+" at 35.222,34.036 h1.52
D8: Top Overlay "+" at 100.968,34.036 h1.52
D10: Top Overlay "+" at 51.659,34.036 h1.52
D12: Top Overlay "+" at 84.532,34.036 h1.52
D15: Top Overlay "+" at 68.095,34.036 h1.52
D16: Top Overlay "+" at 133.841,34.036 h1.52
J1: Mechanical 1 "Mech 2 - Clearance, move to internal plane if present" at 152.021,90.145 h0.3 r270; Mechanical 1 "Mech 1 - Slot cut-out" at 152.521,90.145 h0.3 r270; Mechanical 1 "Assign keep-out area to slot" at 153.521,90.145 h0.3 r270; Mechanical 1 "Alert PCB fab to slot details" at 153.021,90.145 h0.3 r270
U2: Top Overlay "3" at 25.288,44.204 h1.5 r90; Top Overlay "2" at 25.288,41.664 h1.5 r90; Top Overlay "1" at 25.288,39.374 h1.5 r90
U4: Top Overlay "3" at 122.826,44.458 h1.5 r90; Top Overlay "2" at 122.826,41.918 h1.5 r90; Top Overlay "1" at 122.826,39.628 h1.5 r90
U6: Top Overlay "3" at 41.134,44.712 h1.5 r90; Top Overlay "2" at 41.134,42.172 h1.5 r90; Top Overlay "1" at 41.134,39.882 h1.5 r90
U8: Top Overlay "3" at 106.716,44.331 h1.5 r90; Top Overlay "2" at 106.716,41.791 h1.5 r90; Top Overlay "1" at 106.716,39.501 h1.5 r90
U9: Mechanical 13 "ANTENNA AREA" at 115.553,83.439 h0.25; Mechanical 13 "CUTOUT POLYGON" at 115.553,82.931 h0.25
U10: Top Overlay "3" at 57.752,44.077 h1.5 r90; Top Overlay "2" at 57.752,41.537 h1.5 r90; Top Overlay "1" at 57.752,39.247 h1.5 r90
U13: Top Overlay "3" at 90.479,44.458 h1.5 r90; Top Overlay "2" at 90.479,41.918 h1.5 r90; Top Overlay "1" at 90.479,39.628 h1.5 r90
U14: Top Overlay "3" at 73.862,44.585 h1.5 r90; Top Overlay "2" at 73.862,42.045 h1.5 r90; Top Overlay "1" at 73.862,39.755 h1.5 r90
U17: Top Overlay "3" at 140.968,44.077 h1.5 r90; Top Overlay "2" at 140.968,41.537 h1.5 r90; Top Overlay "1" at 140.968,39.247 h1.5 r90